# EAGLE board TurquoiseBicuspid_v1 (EAGLE 6.5.0)
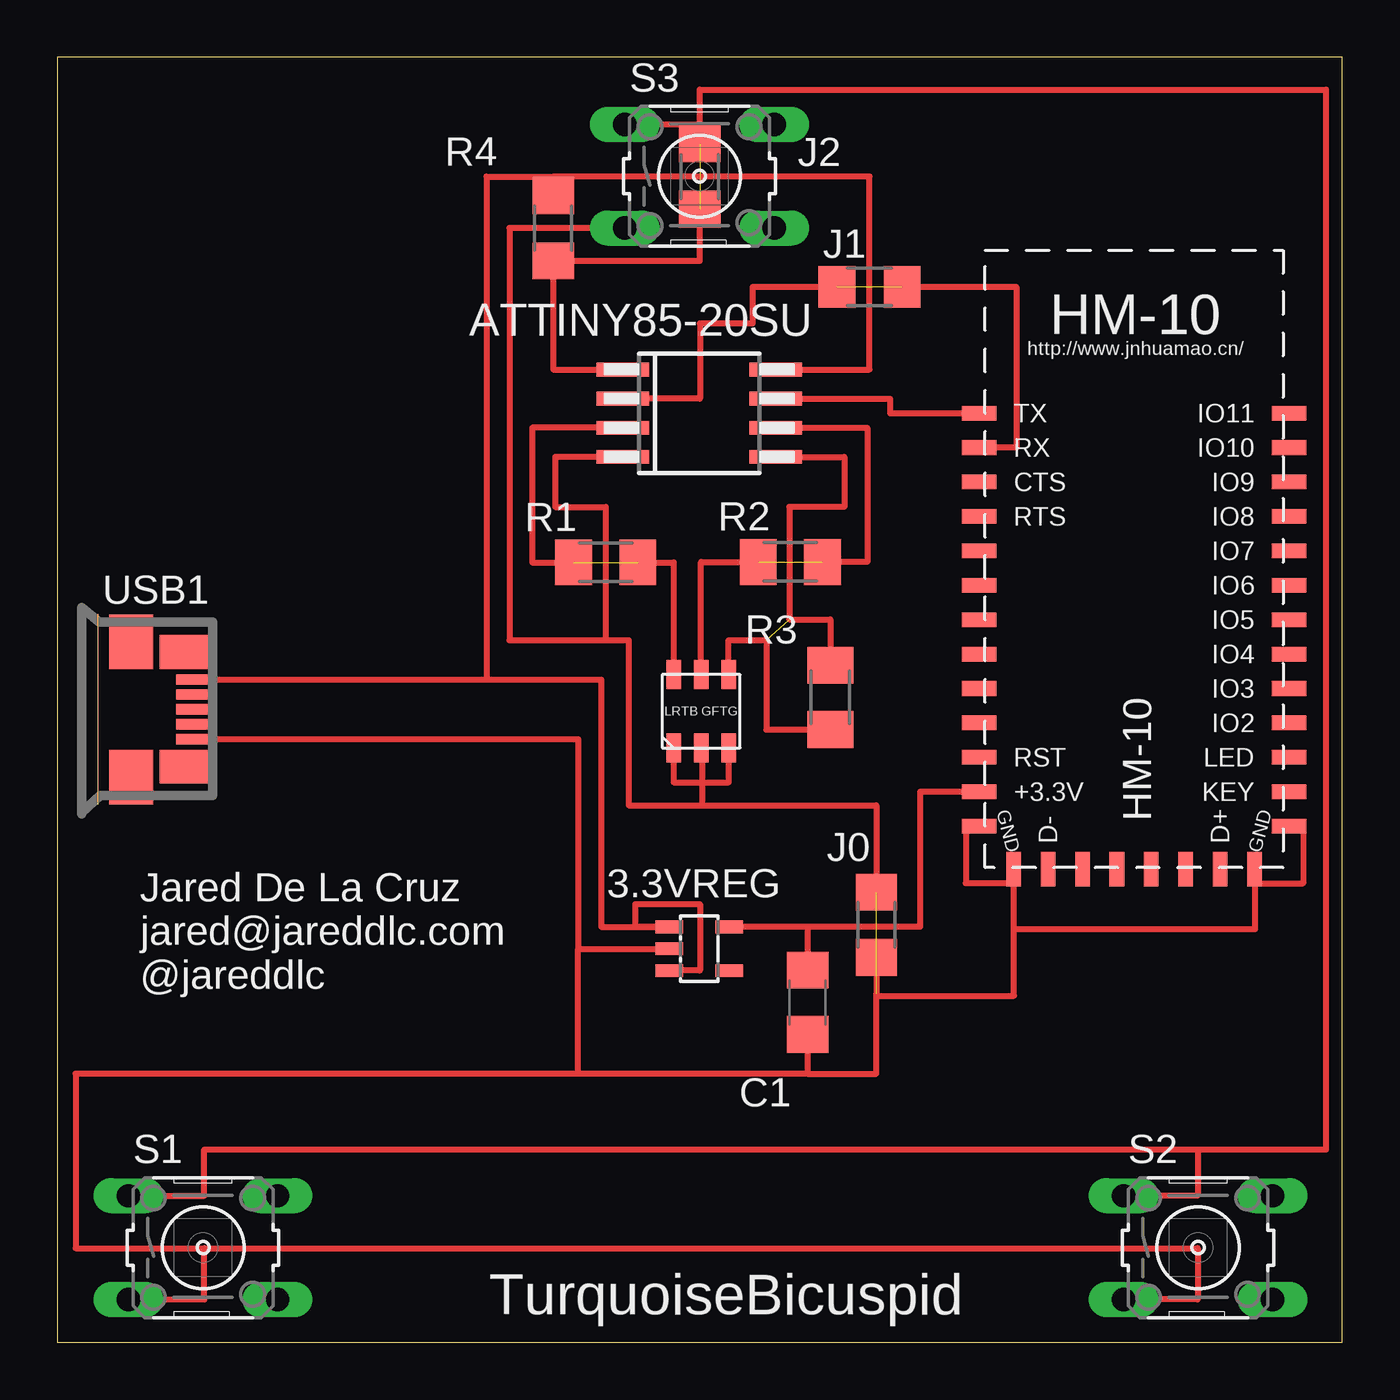
[diagram p0: board, top side]

Size 56 x 56 mm. Coordinates in mm from the lower left corner, seen from the top.
Outline: 0,0 56,0 56,56 0,56 0,0
Copper layers (1*16): Top 0.035mm / dielectric 1.5mm / Bottom 0.035mm
Design rules "default": minimum track width 10mil, minimum drill 24mil, track to track 8mil, track to pad 8mil, pad to pad 8mil, via to via 8mil, smd to smd 8mil, copper to edge 40mil, drill to drill 8mil, minimum pad ring 10mil, minimum via ring 8mil, stop-mask expansion 4mil, vias tented up to drill 0mil, thermal gap 10mil

## Footprints (pad centres in the part's own frame; a part is rotated, then mirrored left to right if it is on the bottom)
SOT23-5 = smd 0.55 x 1.2: 1 -0.95,-1.3; 2 0,-1.3; 3 0.95,-1.3; 4 0.95,1.3; 5 -0.95,1.3
SOIC8_EIAJ_208MIL = smd 0.6 x 2.286: 1 -1.905,-3.33; 2 -0.635,-3.33; 3 0.635,-3.33; 4 1.905,-3.33; 5 1.905,3.33; 6 0.635,3.33; 7 -0.635,3.33; 8 -1.905,3.33
C1206 = smd 1.6 x 1.8: 1 -1.4,0; 2 1.4,0
26.9X13X2.2_BOARD = smd 1.5 x 0.635: 1 -7.5,0; 2 -7.5,-1.5; 3 -7.5,-3; 4 -7.5,-4.5; 5 -7.5,-6; 6 -7.5,-7.5; 8 -7.5,-10.5; 9 -7.5,-12; 10 -7.5,-13.5; 11 -7.5,-15; 12 -7.5,-16.5; 13 -7.5,-18; 22 6,-18; 23 6,-16.5; 24 6,-15; 25 6,-13.5; 26 6,-12; 27 6,-10.5; 28 6,-9; 29 6,-7.5; 30 6,-6; 31 6,-4.5; 32 6,-3; 33 6,-1.5; 34 6,0; $7 -7.5,-9 | smd 0.635 x 1.5: 14 -6,-19.875; 15 -4.5,-19.875; 16 -3,-19.875; 17 -1.5,-19.875; 18 0,-19.875; 19 1.5,-19.875; 20 3,-19.875; 21 4.5,-19.875
R1206 = smd 1.6 x 1.803: 1 -1.422,0; 2 1.422,0
M1206 = smd 1.6 x 2: 1 -1.4,0; 2 1.4,0
B3F-10XX = drill 1.016 long: 1 -3.251,2.261; 2 3.251,2.261; 3 -3.251,-2.261; 4 3.251,-2.261
LRTB_GFTG = smd 0.635 x 1.27: A1 0.5,0; A2 1.7,0; A3 2.9,0; C1 0.5,-3.2; C2 1.7,-3.2; C3 2.9,-3.2
MOLEX-47364-0001 = smd 1.7 x 0.45: 1 2.8,1.3; 2 2.8,0.65; 3 2.8,0; 4 2.8,-0.65; 5 2.8,-1.3 | smd 1.9 x 2.375: GND1 0,2.95; GND4 0,-2.95 | smd 2.1 x 1.475: GND2 2.3,2.5; GND3 2.3,-2.5

## Placement (x,y rotation side)
3.3VREG  3.3V  [SOT23-5]  27.98,17.15 270 top
ATTINY85-20SU  ATTINY85-20S  [SOIC8_EIAJ_208MIL]  27.98,40.49 270 top
C1  0.1µf  [C1206]  32.7,14.81 270 top
HM-10  HM-10-BOARD  [26.9X13X2.2_BOARD]  47.68,40.49 0 top
J0  0Ω  [R1206]  35.7,18.19 270 top
J1  0Ω  [R1206]  35.4,46 180 top
J2  0Ω  [R1206]  28,50.8 90 top
R1  330Ω  [M1206]  23.9,33.99 180 top
R2  330Ω  [M1206]  31.95,34.01 0 top
R3  330Ω  [M1206]  33.69,28.1 90 top
R4  10kΩ  [R1206]  21.61,48.55 270 top
S1  [B3F-10XX]  6.35,4.12 0 top
S2  [B3F-10XX]  49.72,4.12 0 top
S3  [B3F-10XX]  27.99,50.82 0 top
U$1  LRTB_GFTG  [LRTB_GFTG]  26.36,29.1 0 top
USB1  MOLEX-47346-0001  [MOLEX-47364-0001]  3.22,27.58 0 top

## Library data of the parts
3.3VREG = v-reg-micrel; OC_FARNELL: unknown; OC_NEWARK: unknown
ATTINY85-20SU = _hhn_attiny25_45_85
C1 J0 J1 J2 R1-R4 = rcl
HM-10 = JNHuaMao
S1-S3 = switch-omron; MPN: B3F-1000; OC_FARNELL: 176432; OC_NEWARK: 36M3542
U$1 = osram_led
USB1 = usb_con-update

## Nets
3.3V: 3.3VREG.5 C1.1 HM-10.12
5V: 3.3VREG.1 3.3VREG.3 ATTINY85-20SU.8 R4.1 USB1.1
A1: ATTINY85-20SU.3 R1.1 R1.2 U$1.A1
A2: ATTINY85-20SU.6 R2.1 R2.2 U$1.A2
A3: ATTINY85-20SU.5 R3.1 R3.2 U$1.A3
BT_RX: ATTINY85-20SU.2 HM-10.2 J1.1 J1.2
BT_TX: ATTINY85-20SU.7 HM-10.1
GND: 3.3VREG.2 ATTINY85-20SU.4 C1.2 J0.1 S1.3 S2.3 S3.3 U$1.C1 U$1.C2 U$1.C3 USB1.5
N$6: HM-10.13 HM-10.14 HM-10.21 HM-10.22 J0.2
RESET: ATTINY85-20SU.1 J2.1 J2.2 R4.2 S1.1 S2.1 S3.1

## Tracks (layer width: path | path; a pad name or v marks a point on that pad's centre or on a via)
3.3V
  Top 0.254: 3.3VREG.5 32.7,18.1 32.7,18.11 | 32.7,18.11 C1.1 | HM-10.12 37.6,23.99 37.6,18.11 32.7,18.11
5V
  Top 0.254: USB1.1 18.7,28.88 | 18.7,28.88 23.7,28.88 23.7,18.1 3.3VREG.1 25.2,18.1 25.2,19.1 28,19.1 28,16.2 3.3VREG.3 | ATTINY85-20SU.8 35.4,42.4 35.4,50.8 21.7,50.8 21.61,50.8 | 18.7,28.88 18.7,50.8 21.61,50.8 | 21.61,50.8 R4.1
A1  (1 unrouted)
  Top 0.254: R1.1 26.86,33.99 U$1.A1 | ATTINY85-20SU.3 20.7,39.85 20.7,33.99 R1.2
A2  (1 unrouted)
  Top 0.254: ATTINY85-20SU.6 35.3,39.85 35.3,34.01 R2.2 | U$1.A2 28.06,34.01 R2.1
A3  (1 unrouted)
  Top 0.254: ATTINY85-20SU.5 34.3,38.59 34.3,36.4 31.9,36.4 31.9,31.5 33.69,31.5 R3.2 | U$1.A3 29.26,30.6 30.9,30.6 30.9,26.7 R3.1
BT_RX  (1 unrouted)
  Top 0.254: ATTINY85-20SU.2 28,41.12 28,44.4 30.3,44.4 30.3,46 J1.2 | J1.1 41.8,46 41.8,38.99 HM-10.2
BT_TX
  Top 0.254: ATTINY85-20SU.7 36.3,41.12 36.3,40.49 HM-10.1
GND  (2 unrouted)
  Top 0.254: S1.3 6.4,1.86 6.4,4.1 | 6.4,4.1 49.7,4.1 49.7,1.86 S2.3 | USB1.5 22.7,26.28 22.7,17.15 | 22.7,17.15 3.3VREG.2 | U$1.C1 26.86,24.4 29.26,24.4 U$1.C3 | U$1.C2 28.1,25.9 28.1,23.4 | ATTINY85-20SU.4 21.7,38.59 21.7,36.4 23.9,36.4 23.9,30.6 | 23.9,30.6 24.9,30.6 24.9,23.4 28.1,23.4 | S3.3 19.7,48.56 19.7,30.6 23.9,30.6 | 32.7,11.7 22.7,11.7 | 22.7,11.7 22.7,17.15 | 22.7,11.7 0.8,11.7 0.8,4.1 6.4,4.1 | 28.1,23.4 35.7,23.4 J0.1 | C1.2 32.7,11.7 | 32.7,11.7 35.7,11.7 35.7,15.2
N$6
  Top 0.254: HM-10.22 54.3,22.49 54.3,20 52.2,20 | HM-10.21 52.18,20 52.2,20 | HM-10.13 39.6,22.49 39.6,20 41.68,20 | HM-10.14 41.68,20 | 41.68,20 41.7,20 41.7,18 | 52.2,20 52.2,18 41.7,18 | J0.2 35.7,15.1 41.7,15.1 41.7,18
RESET  (1 unrouted)
  Top 0.254: ATTINY85-20SU.1 21.61,42.4 R4.2 28,47.13 J2.1 | S1.1 6.4,6.38 6.4,8.4 49.7,8.4 | 49.7,8.4 49.7,6.38 S2.1 | 49.7,8.4 55.3,8.4 55.3,54.6 28,54.6 J2.2 28,53.08 S3.1

## Text on the board
tPlace: Jared De La Cruz / jared@jareddlc.com / @jareddlc | TurquoiseBicuspid